# Altium PCB ESP32-PCB.PcbDoc (part 3 of 3)
Units mil, origin at the board's own origin, x right, y up, seen from the top; angles counter-clockwise.
Board outline 2800 x 1000 mil, 4 copper layers (L1, L2, L3, L4), stack 61.094 mil thick; 64 components, 76 nets, 301 pads, 135 vias.
Unrouted connection lines stored in the file: 2.
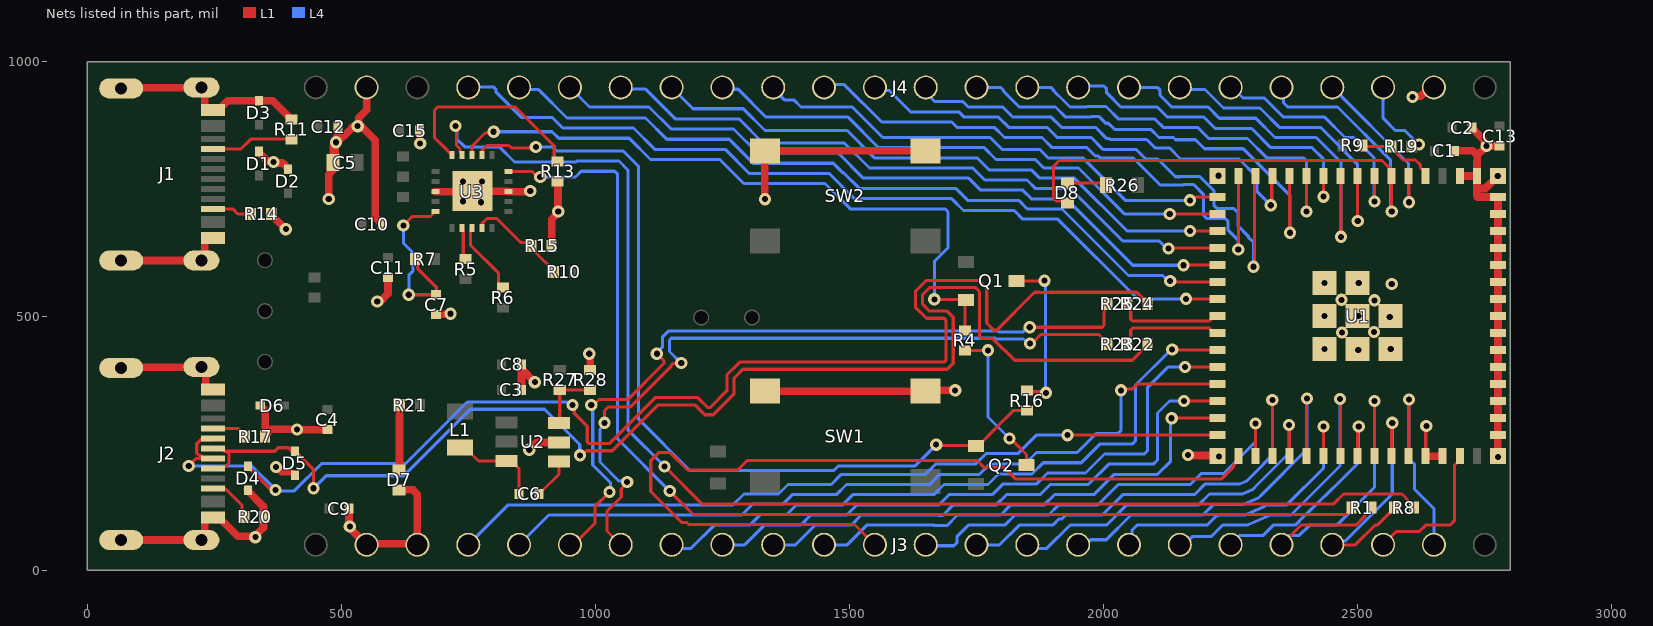
[diagram p4: the nets of this part, all layers, seen from the top]

## Via types
v1: diameter 24, hole 12, L1 to L4, tented both sides, 135 vias

## Nets (pads, with @x,y where several pads share a name; then routed paths per layer and width w, separated by ;. In a path a pad name is that pad's centre, name@x,y a point inside that pad or via, vN(x,y) a via of type N, cw(c..) or ccw(c..) an arc to the next point about the centre after c; other vN are vias at no path point) (continued)
CON2_USB_N: D4.2 J2.A7 J2.B7 R24.2 | length 2711.2
  L1 w6.23: v1(200,205) 215.08,220.08 J2.A7@229.72,220.08 ; J2.A7@247.44,220.08 J2.A7@229.72,220.08 ; J2.B7@247.44,259.45 244.65,256.66 223.33,256.66 215.7,249.03 215.7,230.5 220.46,225.74 224.06,225.74 J2.A7@229.72,220.08 ; D4.2@317,204.24 317,202.67 358.27,161.4 367.6,161.4 v1(371,158) ; v1(955,325.16) 958.4,321.76 958.4,308.93 984,283.33 984,252.83 987.65,249.18 1027.18,249.18 1117.57,339.57 1201.57,339.57 1220.99,320.15 1226.15,320.15 1258.94,352.94 1258.94,384.06 1284.39,409.51 1686.19,409.51 1689.84,413.16 1689.84,492.01 1686.19,495.65 1651.53,495.65 1629.66,517.53 1629.66,548.47 1651.53,570.35 1754.06,570.35 1770.09,554.31 1770.09,486.4 1784.27,472.22 1789.44,472.22 1864.14,546.93 1873.79,546.93 1874.13,546.59 1893.28,546.59 1893.62,546.93 2065.04,546.93 2086,525.97 R24.2@2086,524
  L4 w6.23: v1(200,205) 324,205 v1(371,158) ; v1@372,156 407.88,156 461.88,210 627.29,210 748.29,331 944.35,331 950.19,325.16 v1(955,325.16)
CON2_USB_P: D5.2 J2.A6 J2.B6 R22.2 | length 2556.3
  L1 w6.23: J2.B6@247.44,200.39 250.23,203.18 271.55,203.18 279.18,210.81 279.18,229.35 274.42,234.1 ; J2.A6@247.44,239.76 265.16,239.76 270.82,234.1 274.42,234.1 ; D5.2@406.5,230.17 399,237.67 399,239.24 397.24,241 376.21,241 369.31,234.1 274.42,234.1 ; D5.2@409,234.24 409,232.67 413.76,227.91 415.33,227.91 445.78,197.46 v1(445.78,161.22) ; v1(970,226.07) 973.65,226.07 982.53,234.95 1033.08,234.95 1123.46,325.34 1195.68,325.34 1215.09,305.92 1232.04,305.92 1273.17,347.04 1273.17,378.17 1290.28,395.28 1692.09,395.28 1704.07,407.27 1704.07,497.9 1692.09,509.89 1657.43,509.89 1643.89,523.43 1643.89,542.57 1657.43,556.11 1748.16,556.11 1755.86,548.41 1755.86,459.59 1759.71,455.74 1782.2,455.74 1824.95,413 2056.34,413 2086.37,443.03 R22.2@2086.37,445
  L4 w6.23: v1(445.78,161.22) 470.57,186 623.42,186 754.19,316.77 899.97,316.77 969.33,247.41 969.33,226.74 v1(970,226.07)
CON_ESP_USB_N: J3.19 R25.2 | length 1491.8
  L1 w6.03: J3.19@950,50 957,50 999,92 999,124.62 v1(1028,153.62) ; v1(992,325.16) 996.86,325.16 1007.23,335.52 1063.66,335.52 1135.07,406.93 1135.07,411.93 v1(1121,426) ; v1(1854.74,478) 1997.27,478 2000.8,481.53 2000.8,517.17 R25.2@2007.63,524
  L4 w6.03: v1(992,325.16) 994.98,322.17 994.98,207.11 1029.6,172.49 1029.6,155.23 v1(1028,153.62) ; v1(1121,426) 1121,427.71 1131.81,438.52 1131.81,458.65 1143.61,470.45 1792.36,470.45 1793.9,468.9 1842.22,468.9 1851.31,478 v1(1854.74,478)
CON_ESP_USB_P: J3.18 R23.2 | length 1455.6
  L1 w6.03: v1(1018,290) 1018,313.66 1025.84,321.49 1069.47,321.49 1149.1,401.12 1149.1,403.13 1152.63,406.66 1167.66,406.66 v1(1169,408) ; J3.18@1050,50 1023,77 1023,116.07 1051.02,144.09 1051.02,159.86 1062.63,171.47 v1(1062.63,173.49) ; v1(1855,446) 1858.53,446 1876.5,463.97 1990.63,463.97 2007.63,446.97 R23.2@2007.63,445
  L4 w6.03: v1(1018,290) 1018,286.47 1009.02,277.48 1009.02,212.93 1046.69,175.25 1060.86,175.25 v1(1062.63,173.49) ; v1(1169,408) 1168.36,408 1145.84,430.52 1145.84,452.84 1149.42,456.42 1786.55,456.42 1788.09,454.87 1842.48,454.87 1851.36,446 v1(1855,446)
CON_GPIO0: J4.3 R19.1 | length 175.6
  L1 w6: J4.3@2550,950 J4.3@2554.81,945.19 ; R19.1@2605.37,834 2607.17,835.8 2618.51,835.8 v1(2620.32,837.61)
  L4 w6: J4.3@2550,950 2550,889.37 2574.54,864.83 2593.09,864.83 v1(2620.32,837.61)
DTR_FTDI: Q1.3 R4.1 U3.18 | length 1331.7
  L1 w6: U3.18@757.09,819.74 757.09,832.84 757.25,833 757.25,834.37 782.95,860.06 797.32,860.06 v1(800,862.74) ; v1(1667,533) 1667.5,532.5 1725.5,532.5 1727,531 R4.1@1727,472
  L4 w6: v1(800,862.74) 914.92,862.74 927.75,849.91 1066.72,849.91 1108.62,808 1245,808 1292.28,760.72 1451.72,760.72 1501.38,711.05 1688.14,711.05 1694,705.19 1694,634.49 1667,607.49 v1(1667,533)
ESP_USB_N: R24.1 R25.1 U1.23 | length 206.9
  L1 w6.03: R25.1@2049.25,521.75 2053.46,517.54 2053.46,493.81 2056.99,490.28 2208.14,490.28 2211.68,493.81 2211.68,495.14 2216.54,500 U1.23@2224.41,500
ESP_USB_P: R22.1 R23.1 U1.24 | length 207.6
  L1 w6.03: R22.1@2047,445 2053.46,451.46 2053.46,472.72 2056.99,476.25 2208.14,476.25 2211.68,472.72 2211.68,471.39 2216.54,466.54 U1.24@2224.41,466.54
FTDI_USB_N: R6.2 U3.8 | length 145.9
  L1 w6.03: U3.8@757.02,673.17 755.11,671.26 755.11,665.7 754.19,664.77 754.19,656 754.19,640.04 809.2,585.03 809.2,562.83 816.03,556 R6.2@818,556
FTDI_USB_P: R5.2 U3.9 | length 80.6
  L1 w6.03: U3.9@737.33,673.17 739.24,671.26 739.24,665.7 740.16,664.77 740.16,656 740.16,618.83 740.24,618.75 753.72,618.75 751.75,618.75 R5.2@745,612
GND: C1.1 C2.1 C3.2 C4.1 C5.1 C7.1 C8.1 C9.1 C10.1 C11.1 C12.1 C13.1 C15.1 D1.1 D2.1 D3.1 D4.1 D5.1 D6.1 D7.2 J1.A1B12 J1.B1A12 J1.S1 J1.S2 J1.S3 J1.S4 J2.A1B12 J2.B1A12 J2.S1 J2.S2 J2.S3 J2.S4 J3.22 J3.23 J4.2 J4.23 R11.2 R13.2 R14.2 R15.1 R17.2 R20.2 R28.1 SW1.3 SW2.3 U1.1 U2.2 U3.3 U3.13 U3.21 | length 4963.8
  L1 w6: U1.1@2633.86,224.41 2633.86,282.86 v1(2635,284) ; U1.1@2700.79,775.59 U1.1@2700.79,783.46
  L1 w15: J2.S4@67.13,59.45 J2.S2@225,59.45 231.32,65.77 231.32,99.63 235.63,103.94 J2.B1A12@247.44,103.94 251.75,99.63 263.56,99.63 296.5,66.69 329.31,66.69 v1(331,65) 331,67.44 347.03,83.46 347.03,125.4 317,155.43 D4.1@317,157 317,158.57 316.63,158.95 D4.1@315.05,158.95 ; J2.S3@67.13,398.03 68.11,399.02 224.02,399.02 J2.S1@225,400 233.31,391.69 233.31,360.22 237.62,355.91 J2.A1B12@247.44,355.91 ; J1.S4@67.13,609.45 J1.S2@225,609.45 231.32,615.77 231.32,649.63 235.63,653.94 J1.B1A12@247.44,653.94 ; J1.S3@67.13,948.03 68.11,949.02 224.02,949.02 J1.S1@225,950 231.32,943.68 231.32,910.22 235.63,905.91 259.25,905.91 277.13,923.78 D3.1@338.11,923.78 365.22,923.78 397.69,891.31 397.69,889.34 400.03,887 R11.2@402,887 ; D1.1@338.11,823.78 338.11,822.2 355.59,804.72 365.28,804.72 v1(367,803) 368.72,801.28 384.54,801.28 395,790.82 D2.1@395,789.24 ; D6.1@340.76,324 342.33,324 342.7,323.63 342.7,322.05 350.37,314.39 R17.2@350.37,264.97 ; R17.2@350.37,261.03 R17.2@350.37,263 R17.2@350.37,264.97 ; R14.2@362.37,701 362.37,699.03 384,677.4 384,678 v1(391,671) ; v1(372,203) 374.44,203 383.49,193.95 398.63,193.95 ; 401.2,277 362.4,277 R17.2@350.37,264.97 ; v1(413.2,276.63) C4.1@466.63,276.63 ; v1(475.5,730.2) 475.5,778.86 484.5,787.86 484.5,834.09 522.35,871.94 530.03,871.94 532.46,869.5 534.9,871.94 541.24,871.94 566.99,846.19 566.99,695 580,681.98 C10.1@580,681 ; C5.1@483.76,802 488.3,806.55 488.3,840.26 v1(490.02,841.98) ; v1@490,839 v1(490.02,841.98) ; C12.1@494,873 492.64,871.64 492.64,847.03 490,844.39 v1(490.02,841.98) ; C9.1@514,121 C9.1@515.37,121 515.37,84.63 J3.23@550,50 552.44,52.44 647.56,52.44 J3.22@650,50 ; v1(532.46,873.66) 534.19,875.38 534.19,890.19 550,906 J4.23@550,950 ; v1(571,529) 572.72,530.72 578.45,530.72 592,544.27 C11.1@592,575.63 ; D7.2@614,158 641.21,158 650,149.21 J3.22@650,52.44 ; C15.1@654.37,865 654.87,864.5 654.87,840.34 v1(655.37,839.84) ; U3.13@685.17,745.02 U3.21@757.02,745.02 ; C7.1@686.92,502.71 687.9,503.7 714.34,503.7 v1(715.32,504.68) ; U3.21@758,746 828.49,746 828.87,745.63 U3.3@828.87,745.02 v1@872.98,745.02 ; C3.2@854.37,355 854.69,355.31 C8.1@854.69,396 ; C8.1@855,405 855,396 v1(881,370) ; v1(870,237) 884.42,251.42 U2.2@928.35,251.42 ; v1(872,746) v1@872.98,745.02 ; v1@876.19,744.24 875.42,745.02 v1@872.98,745.02 ; R15.1@914,638 914,690.56 927,703.56 v1(927,706) 926.5,706.5 926.5,764.5 R13.2@926,765 ; v1(988,426) 990,424 R28.1@990,394.37 R28.1@988.03,394.37 ; SW1.3@1333.46,352.17 SW1.3@1650,352.17 1651.83,354 v1(1708,354) ; v1@1333.46,735.46 SW2.3@1333.46,825 SW2.3@1650,825 ; v1(2166,227) 2167.3,225.7 2225.3,225.7 v1(2227,224) ; U1.1@2224.01,775.19 2225.04,776.22 v1(2226.22,776.22) ; v1(2608,931) 2609.72,932.72 2624,932.72 2641.27,950 J4.2@2650,950 ; U1.1@2633.86,224.41 U1.1@2667.32,224.41 ; C1.1@2690.37,825 2726.18,825 2735.09,816.09 ; U1.1@2700.79,775.59 U1.1@2734.25,775.59 ; C2.1@2725,871 2725,870.02 2741.76,853.26 2741.95,853.26 2749.13,846.08 2749.13,841.57 2753.63,837.07 v1(2753.63,834.63) ; 2734.25,737.69 U1.1@2734.25,775.59 ; 2735.06,751.06 2751.06,751.06 v1(2775.59,775.59) ; 2735.69,734.25 U1.1@2775.59,734.25 U1.1@2775.96,733.88 ; U1.1@2767.34,216.16 U1.1@2775.59,224.41 U1.1@2775.59,299.21 ; v1(2776,223) U1.1@2776,224 ; U1.1@2776,299.21 U1.1@2776,733.88 ; C13.1@2779,834.63 v1(2753.63,834.63) ; U1.1@2734.25,775.59 2734.63,775.96 2734.63,803.44 2735.09,803.91 2735.09,816.09 ; 2735.09,816.09 v1(2753.63,834.63)
  L4 w15: J4.2@2650,950 J4.2@2651.11,948.89
  other v1: 517,86 2501,433 2435.04,435.04 2564.96,435.04 2469,468 2532,469 2563,498 2435.04,500 2501,500 2533,531 2468,532 2567,563 2435.04,564.96 2502,565 775,724 740,726 1334,730 740,765 777,765
GPIO0: R9.2 R19.2 U1.4 | length 158.5
  L1 w6: R9.2@2509.37,834 R19.2@2566,834 2566,832.03 2572.81,825.22 2572.81,823.69 2589.31,807.19 2613.63,807.19 2623.27,797.55 2623.27,792.2 2629.13,786.34 2630.98,786.34 2633.86,783.46 U1.4@2633.86,775.59
GPIO1: J4.4 U1.5 | length 340.4
  L1 w6: U1.5@2600.39,775.59 2600.39,724.61 v1(2601,724)
  L4 w6: J4.4@2450,950 2599.91,800.09 2599.91,725.09 v1(2601,724)
GPIO2: D8.2 J4.5 U1.6 | length 1246.7
  L1 w6: D8.2@1930.66,720.97 1925.4,726.23 1907.77,726.23 1901.2,732.8 1901.2,794.14 1913.06,806 2202.11,806 2202.45,806.34 2547.55,806.34 2547.89,806 2564.06,789.84 2564.06,778.46 U1.6@2566.93,775.59 v1(2566.93,706)
  L4 w6: J4.5@2350,950 2354.14,945.86 2354.14,919.52 2362.29,911.38 2460.34,911.38 2564.25,807.47 2564.25,708.68 v1(2566.93,706)
GPIO3: J4.6 U1.7 | length 476.4
  L1 w6: v1(2533.23,725.3) 2533.35,725.42 2533.35,775.47 U1.7@2533.46,775.59
  L4 w6: J4.6@2250,950 2253.74,950 2274.48,929.26 2316.12,929.26 2354,891.38 2434.91,891.38 2474.91,851.38 2492.05,851.38 2531.87,811.56 2531.87,726.66 v1(2533.23,725.3)
GPIO4: J4.7 U1.8 | length 612.6
  L1 w6: v1(2500,687) U1.8@2500,775.59
  L4 w6: J4.7@2150,950 2154.14,945.86 2199.52,945.86 2236.12,909.26 2307.83,909.26 2345.72,871.38 2426.62,871.38 2500,798 v1(2500,687)
GPIO5: J4.8 U1.9 | length 750.4
  L1 w6: U1.9@2466.54,775.59 2466.77,775.36 2466.77,656.23 v1(2467,656)
  L4 w6: J4.8@2050,950 2105.52,950 2111.38,944.14 2111.38,934 2134,911.38 2205.72,911.38 2227.83,889.26 2247.74,889.26 2299.55,889.26 2337.43,851.38 2418.34,851.38 2467,802.72 v1(2467,656)
GPIO6: J4.9 U1.10 | length 662.4
  L1 w6: v1(2433,735) 2433.07,735.07 U1.10@2433.07,775.59
  L4 w6: J4.9@1950,950 1952.63,952.63 2000.51,952.63 2006,947.14 2006,939.38 2034,911.38 2105.72,911.38 2125.72,891.38 2197.43,891.38 2219.55,869.26 2238.74,869.26 2291.26,869.26 2329.15,831.38 2410.05,831.38 2433,808.43 v1(2433,735)
GPIO7: J4.10 U1.11 | length 779.7
  L1 w6: v1(2399,706) 2399,707 2399.61,707.61 U1.11@2399.61,775.59
  L4 w6: J4.10@1850,950 1896.14,950 1902,944.14 1902,943 1912,933 1912.38,933 1934,911.38 1966,911.38 1966.98,912.36 2004.74,912.36 2005.72,911.38 2029.6,887.5 2101.31,887.5 2117.43,871.38 2184.62,871.38 2206.74,849.26 2230.45,849.26 2282.98,849.26 2320.87,811.38 2393.14,811.38 2399,805.52 v1(2399,706)
GPIO8: J4.11 U1.12 | length 892
  L1 w6: U1.12@2366.14,775.59 2366.14,666.86 2367,666 v1(2367,664)
  L4 w6: J4.11@1750,950 1797.14,950 1803,944.14 1803,942.38 1834,911.38 1905.34,911.38 1925.34,891.38 1974.28,891.38 1975.26,892.36 1991.36,892.36 2004.28,879.44 2009.37,879.44 2021.31,867.5 2093.03,867.5 2109.15,851.38 2137.43,851.38 2141.81,847 2180.72,847 2198.45,829.26 2274.7,829.26 2367,736.96 v1(2367,664)
GPIO9: J4.12 U1.13 | length 856.7
  L1 w6: v1(2329,718) 2330.84,719.84 2330.84,773.75 U1.13@2332.68,775.59
  L4 w6: J4.12@1650,950 1650,940.34 1668.34,922 1723.38,922 1734,911.38 1801.62,911.38 1821.62,891.38 1897.05,891.38 1917.05,871.38 1984.05,871.38 2006.43,849 2011.53,849 2013.03,847.5 2084.74,847.5 2101.24,831 2129.53,831 2151.26,809.26 2266.41,809.26 2301.44,774.24 2301.44,745.56 v1(2329,718)
GPIO10: J4.13 U1.14 | length 1133.7
  L1 w6: v1(2295,597) 2297.11,599.11 2297.11,773.48 U1.14@2299.21,775.59
  L4 w6: J4.13@1550,950 1556.31,943.69 1578.31,943.69 1620,902 1715.1,902 1725.72,891.38 1793.34,891.38 1813.34,871.38 1888.77,871.38 1908.77,851.38 1975.77,851.38 1999.65,827.5 2064.65,827.5 2082.88,809.26 2106.45,809.26 2141.59,774.13 2149.87,774.13 2150.53,774.79 2189.47,774.79 2217,747.26 2217,717.86 2222.86,712 2255.71,712 2265,702.71 2265,677.28 2284.91,657.38 2284.91,655.09 2295,645 v1(2295,597)
GPIO11: J4.14 U1.15 | length 1141.7
  L1 w6: v1(2265,631) 2265.37,631.37 2265.37,775.22 U1.15@2265.75,775.59
  L4 w6: J4.14@1450,950 1455.38,955.38 1490,955.38 1563.38,882 1701,882 1711.62,871.38 1785.05,871.38 1805.05,851.38 1879,851.38 1899,831.38 1967.49,831.38 1983.86,815 1989.52,815 1993.02,811.5 2058.02,811.5 2111.39,758.13 2156.5,758.13 2157.16,758.79 2177.18,758.79 2197,738.97 2197,697.86 2202.86,692 2239.14,692 2245,686.14 2245,669 2264.91,649.09 2264.91,631.09 v1(2265,631)
GPIO12: J4.15 U1.16 | length 970.7
  L1 w6: v1(2170,727.79) 2173.79,727.79 2180.25,734.25 U1.16@2224.41,734.25
  L4 w6: J4.15@1350,950 1350,947.38 1371.86,925.52 1390.48,925.52 1404.62,911.38 1505.62,911.38 1565.62,851.38 1776.77,851.38 1800.1,828.05 1874.05,828.05 1890.72,811.38 1959,811.38 2042.59,727.79 v1(2170,727.79)
GPIO13: J4.16 U1.17 | length 1077.9
  L1 w6: v1@2130,701 v1(2130.21,700.79) U1.17@2224.41,700.79
  L4 w6: J4.16@1250,950 1253.67,946.33 1280.95,946.33 1335.91,891.38 1497.34,891.38 1557.34,831.38 1765,831.38 1788.33,808.05 1865.76,808.05 1882.43,791.38 1950.72,791.38 2040.87,701.22 2129.78,701.22 v1(2130.21,700.79)
GPIO14: J4.17 U1.18 | length 1192
  L1 w6: v1@2170,667 v1(2170.32,667.32) U1.18@2224.41,667.32
  L4 w6: J4.17@1150,950 1192,908 1291,908 1334,865 1495.43,865 1549.05,811.38 1751,811.38 1774.62,787.76 1857.76,787.76 1874.15,771.38 1942.43,771.38 2046.49,667.32 v1(2170.32,667.32)
GPIO15: J4.18 U1.19 | length 1306.5
  L1 w6: v1(2128,633) 2128.86,633.86 U1.19@2224.41,633.86
  L4 w6: J4.18@1050,950 1052.86,947.14 1099,947.14 1099,946.38 1157.38,888 1282.72,888 1330,840.72 1490,840.72 1539.34,791.38 1742.72,791.38 1766.33,767.76 1849.48,767.76 1866.48,750.76 1934.76,750.76 2038.2,647.32 2109.89,647.32 2124.21,633 v1(2128,633)
GPIO16: J4.19 U1.20 | length 1419.5
  L1 w6: v1(2157,600) 2157.2,600.2 2224.21,600.2 U1.20@2224.41,600.39
  L4 w6: J4.19@950,950 988.62,911.38 1105.72,911.38 1149.1,868 1272,868 1319.28,820.72 1478,820.72 1527.34,771.38 1734.43,771.38 1758.05,747.76 1841.19,747.76 1858.19,730.76 1926.48,730.76 1950.24,707 2057.24,600 v1(2157,600)
GPIO17: J4.20 U1.21 | length 1533.1
  L1 w6: v1(2131,569) 2133.07,566.93 U1.21@2224.41,566.93
  L4 w6: J4.20@850,950 854.39,945.61 888.62,945.61 944.32,889.91 1098.91,889.91 1140.81,848 1263.72,848 1311,800.72 1468.28,800.72 1487,782 1488.43,782 1519.05,751.38 1709,751.38 1732.62,727.76 1832.91,727.76 1849.91,710.76 1918.19,710.76 2048.96,580 2116.21,580 2127.21,569 v1(2131,569)
GPIO18: J4.21 U1.22 | length 1650.6
  L1 w6: v1(2162,534) 2162.27,533.73 2224.14,533.73 U1.22@2224.41,533.46
  L4 w6: J4.21@750,950 751,951 799.14,951 805,945.14 805,940.38 854.38,891 914.94,891 936.04,869.91 1075,869.91 1116.91,828 1255.43,828 1302.72,780.72 1460,780.72 1509.67,731.05 1701.05,731.05 1724.33,707.76 1824,707.76 1841,690.76 1909.91,690.76 2066.67,534 v1(2162,534)
GPIO21: J3.17 U1.25 | length 1304.1
  L1 w6: v1(2135,434) 2135.46,433.54 2223.94,433.54 U1.25@2224.41,433.07
  L4 w6: J3.17@1150,50 1157,43 1188.38,43 1234,88.62 1304.06,88.62 1325.44,110 1377,110 1395.62,128.62 1486.67,128.62 1506.67,148.62 1666,148.62 1686,168.62 1772.43,168.62 1793.24,189.43 1859.29,189.43 1881.32,211.45 1956.26,211.45 1993.43,248.62 2057.14,248.62 2063,254.48 2063,364.47 2132.53,434 v1(2135,434)
GPIO26: J3.16 U1.26 | length 1192.9
  L1 w6: v1@2160,400 v1(2160.39,399.61) U1.26@2224.41,399.61
  L4 w6: J3.16@1250,50 1293.73,50 1332.35,88.62 1404.06,88.62 1424.06,108.62 1494.96,108.62 1514.96,128.62 1676.05,128.62 1696.05,148.62 1780.72,148.62 1801.52,169.43 1867.57,169.43 1889.6,191.45 1964.55,191.45 2001.72,228.62 2080.19,228.62 2086.05,234.48 2086.05,359.23 2126.42,399.61 v1(2160.39,399.61)
GPIO33: J3.15 U1.28 | length 1046.6
  L1 w6: v1(2158,333) 2158.32,332.68 U1.28@2224.41,332.68
  L4 w6: J3.15@1350,50 1393.73,50 1432.35,88.62 1503.24,88.62 1523.24,108.62 1674.28,108.62 1675.17,107.74 1683.45,107.74 1704.34,128.62 1789,128.62 1809,148.62 1875.05,148.62 1895.05,168.62 1970,168.62 2010,208.62 2097.72,208.62 2106.05,216.95 2106.05,309.23 2129.82,333 v1(2158,333)
GPIO34: J3.14 U1.29 | length 926.6
  L1 w6: v1(2134,299) 2134.11,299.11 2224.3,299.11 U1.29@2224.41,299.21
  L4 w6: J3.14@1450,50 1495.38,50 1534,88.62 1666,88.62 1666.88,87.74 1691.74,87.74 1712.62,108.62 1797.43,108.62 1817.43,128.62 1883.34,128.62 1903.34,148.62 1980.87,148.62 2020.87,188.62 2106,188.62 2132,214.62 2132,297 v1(2134,299)
GPIO35: J3.13 U1.31 | length 1770.5
  L1 w6: J3.13@1550,50 1510,90 1183.84,90 1179.84,94 1169.94,94 1109,154.94 1109,215.49 1124.82,231.31 1147.18,231.31 1181.49,197 1280.12,197 1299.12,216 1750.97,216 1764.52,202.45 1803.79,202.45 1826.45,179.79 2232.5,179.79 2255.16,202.45 2255.16,205.94 2262.87,213.66 2262.87,221.54 U1.31@2265.75,224.41
GPIO36: J3.12 U1.32 | length 842.3
  L1 w6: v1@2299,289 v1(2299.11,288.89) 2299.21,288.79 U1.32@2299.21,224.41
  L4 w6: J3.12@1650,50 1651.86,48.14 1705.52,48.14 1711.38,54 1711.38,66 1734,88.62 1805.72,88.62 1825.72,108.62 1891.62,108.62 1911.62,128.62 1989.15,128.62 2029.15,168.62 2170.49,168.62 2191.86,190 2236,190 2299.11,253.11 v1(2299.11,288.89)
GPIO37: J3.11 U1.33 | length 873.6
  L1 w6: v1(2332,335) 2332.68,334.32 U1.33@2332.68,224.41
  L4 w6: J3.11@1750,50 1795.38,50 1834,88.62 1899.91,88.62 1912.28,101 1918.1,101 1925.72,108.62 1997.43,108.62 2037.43,148.62 2178.77,148.62 2200.15,170 2257.72,170 2268.79,170 2281.73,175.73 2294.81,188.81 2332,226 v1(2332,335)
GPIO38: J3.10 U1.34 | length 711.2
  L1 w6: v1(2365,286) 2366.14,284.86 U1.34@2366.14,224.41
  L4 w6: J3.10@1850,50 1857,43 1888.38,43 1934,88.62 2005.72,88.62 2045.72,128.62 2187.05,128.62 2208.43,150 2266,150 2273.02,150 2293.24,158.95 2303.03,168.74 2365,230.72 v1(2365,286)
GPIO39: J3.9 U1.35 | length 739.3
  L1 w6: U1.35@2399.61,224.41 2399.61,337.61 v1(2400,338)
  L4 w6: J3.9@1950,50 1957.13,57.13 1971.61,57.13 1974.48,60 2005.38,60 2054,108.62 2195.34,108.62 2215.72,129 2275,129 2304.74,142.18 2311.25,148.68 2400,237.43 v1(2400,338)
GPIO40: J3.8 U1.36 | length 596.1
  L1 w6: v1(2433,283) 2433.07,282.93 U1.36@2433.07,224.41
  L4 w6: J3.8@2050,50 2055.81,55.81 2055.81,78.81 2065.62,88.62 2203.62,88.62 2222,107 2224.1,107 2225.72,108.62 2278.38,108.62 2316.25,125.4 2319.47,128.62 2360.34,128.62 2433,201.28 v1(2433,283)
GPIO41: J3.7 U1.37 | length 620.4
  L1 w6: v1(2465,337) 2465,336 2466.54,334.46 U1.37@2466.54,224.41
  L4 w6: J3.7@2150,50 2158.48,50 2174.48,66 2211.38,66 2234,88.62 2280.49,88.62 2282.61,88.62 2284.54,89.48 2327.76,108.62 2368.62,108.62 2465,205 v1(2465,337)
GPIO42: J3.6 U1.38 | length 449
  L1 w6: U1.38@2500,224.41 2500,281 v1(2502,283)
  L4 w6: J3.6@2250,50 2268.62,68.62 2314,68.62 2334,88.62 2347.57,88.62 2376.91,88.62 2395.48,107.19 2398.71,110.03 2470.21,180.21 2502,212 v1(2502,283)
GPIO45: J3.2 U1.41 | length 418.1
  L1 w6: U1.41@2600.39,224.41 2600.39,335.39 v1(2601,336)
  L4 w6: v1(2601,336) 2601,219 2612,208 2612,159 2650,121 J3.2@2650,50
GPIO46: J3.3 U1.44 | length 291.3
  L1 w6: J3.3@2550,50 2576,76 2621.38,76 2634,88.62 2681.62,88.62 2690.2,97.2 2690.2,205.94 2700.79,216.54 U1.44@2700.79,224.41
GPIO47: J3.20 U1.27 | length 1551.9
  L1 w6: v1(2034,354) 2036.68,356.68 2056.54,356.68 2066,366.14 U1.27@2224.41,366.14
  L4 w6: J3.20@850,50 908.62,108.62 1288,108.62 1309.38,130 1368.72,130 1387.34,148.62 1474,148.62 1494,168.62 1657.72,168.62 1677.72,188.62 1756,188.62 1776.8,209.43 1846,209.43 1868.03,231.45 1947.98,231.45 1985.15,268.62 2028.14,268.62 2034,274.48 v1(2034,354)
GPIO48: J3.21 U1.30 | length 1563.8
  L1 w6: v1(1929.08,265.75) U1.30@2224.41,265.75
  L4 w6: J3.21@750,50 828.62,128.62 1271,128.62 1292.38,150 1360.43,150 1379.05,168.62 1464,168.62 1484,188.62 1649.43,188.62 1669.43,208.62 1747.72,208.62 1768.52,229.43 1831.43,229.43 1867.75,265.75 v1(1929.08,265.75)
NetC6_1: C6.1 L1.1 U2.6 | length 182.9
  L1 w6: L1.1@734.09,241.14 743.94,241.14 770.08,215 U2.6@825,215 834.84,215 850,199.84 C6.1@850,150
NetC6_2: C6.2 U2.1 | length 80.7
  L1 w6: C6.2@889.37,150 889.37,150.98 893.23,154.84 894.21,154.84 928.35,188.98 U2.1@928.35,214.02
NetC7_2: C7.2 R7.2 U3.11 | length 356.6
  L1 w6: v1(622.23,678.43) 639.8,696 675.52,696 682.29,702.77 682.29,705.57 682.37,705.65 U3.11@685.17,705.65 ; v1(633,542) v1(633,542) 686.88,542.04 C7.2@686.92,542.08 ; R7.2@645,612 649.84,607.16 649.84,594.39 687.26,556.97 C7.2@687.26,550.16
  L4 w6: v1(622.23,678.43) 622.23,643.77 640.92,625.08 640.92,588.44 633,580.52 v1(633,542)
NetD7_1: D7.1 R21.2 | length 128.3
  L1 w15: D7.1@614,197.37 614.81,198.19 614.81,324.19 R21.2@615.63,325
NetD8_1: D8.1 R26.1 | length 77.9
  L1 w6: D8.1@1929,762 R26.1@2000.7,762
  L1 w15: R26.1@2000.7,762 2005.01,757.69 R26.1@2005.01,757.61
NetJ1_A5: J1.A5 R11.1 | length 161.9
  L1 w6: J1.A5@247.44,829.13 302.69,829.13 321.78,848.23 R11.1@401.4,848.23
NetJ1_B5: J1.B5 R14.1 | length 79.7
  L1 w6: J1.B5@247.44,711.02 286.65,711.02 296.67,701 R14.1@323,701
NetJ2_A5: J2.A5 R17.1 | length 71.4
  L1 w6: J2.A5@247.44,279.13 296.83,279.13 311,264.97 R17.1@311,263
NetJ2_B5: J2.B5 R20.1 | length 96
  L1 w6: J2.B5@247.44,161.02 248.35,160.12 272.33,160.12 305.16,127.29 305.16,109.84 R20.1@310,105
NetQ1_1: Q1.1 R16.2 | length 317.7
  L1 w6: Q1.1@1828.41,569.4 1883.4,569.4 v1(1883.7,569.7) v1@1884,570 ; R16.2@1849,353.37 1851.18,351.19 1884.81,351.19 v1(1887,349)
  L4 w6: v1(1883.7,569.7) 1885.35,568.05 1885.35,350.65 v1(1887,349)
NetQ2_1: Q2.1 R4.2 | length 295.7
  L1 w6: R4.2@1727,432.63 v1(1772.63,432.63) v1@1773,433 ; v1@1822,254 1848.41,227.59 Q2.1@1848.41,206.6
  L4 w6: v1(1772.63,432.63) 1772.63,301.37 v1(1815,259)
NetR13_1: R13.1 U3.16 | length 406.3
  L1 w6: U3.16@717.65,816.87 701.51,833 684,850.51 684,905.52 689.86,911.38 842.62,911.38 919.19,834.81 919.19,809.21 924.03,804.37 R13.1@926,804.37
NetR27_1: R27.1 R28.2 U2.3 | length 125.9
  L1 w6: U2.3@928.35,289.8 930,291.46 R27.1@930,355 R28.2@990,355
RTS_FTDI: Q2.2 R16.1 U3.19 | length 1692.3
  L1 w6: U3.19@776.78,819.74 776.78,825.61 786.91,835.74 830.19,835.74 832.93,833 835.19,830.74 856,830.74 880.74,830.74 v1(882.91,832.91) ; v1(1670.68,247) 1672.18,245.5 1747.5,245.5 Q2.2@1749,244 1752.94,244 1790.97,282.03 1790.97,282.78 1822.19,314 R16.1@1849,314
  L4 w6: v1(882.91,832.91) 916.47,832.91 924.38,825 1054.71,825 1085.35,794.37 1085.35,296.84 1186.18,196 1468.75,196 1477.37,204.62 1628.3,204.62 v1(1670.68,247)
RXD_FTDI: R1.2 U3.1 | length 2259.5
  L1 w6: U3.1@828.87,784.39 875.61,784.39 883.58,776.42 888.97,776.42 v1(891.65,773.74) ; v1(1146.5,155.62) 1192.12,110 2476.97,110 2488,121.03 R1.2@2488,123
  L4 w6: v1(891.65,773.74) 961.16,773.74 972.42,785 1038.14,785 1044,779.14 1044,258.12 v1(1146.5,155.62)
TXD_FTDI: R8.2 U3.17 | length 2588.9
  L1 w6: v1(725,874) 726.91,872.09 726.91,835.96 729.86,833 733.57,829.3 733.57,825.68 733.65,825.6 733.65,823.35 U3.17@737.25,819.74 ; v1(1136,204.31) 1210.31,130 2452.13,130 2471.94,149.81 2587.06,149.81 2595.84,141.02 2595.84,139.5 2610.37,124.97 R8.2@2610.37,123
  L4 w6: v1(725,874) 727.68,871.32 727.68,848.19 742.87,833 811,833 841,803 856,803 962.14,803 964.14,805 1046.43,805 1064,787.43 1064,276.31 v1(1136,204.31)
U0RXD: J3.4 R8.1 U1.40 | length 517.8
  L1 w6: J3.4@2450,50 2495.38,50 2534,88.62 2538.59,88.62 2571,121.03 R8.1@2571,123 ; U1.40@2566.93,224.41 2566.93,288.93 v1(2568,290)
  L4 w6: J3.4@2450,50 2457.13,57.13 2475.13,57.13 2568,150 v1(2568,290)
U0TXD: J3.5 R1.1 U1.39 | length 725.6
  L1 w6: J3.5@2350,50 2388.62,88.62 2496.49,88.62 2512.84,104.98 2512.84,106.5 2527.37,121.03 R1.1@2527.37,123 ; v1(2533,333) 2533.46,332.54 U1.39@2533.46,224.41
  L4 w6: J3.5@2350,50 2350,62.76 2355.86,68.62 2385.19,68.62 2405.46,88.62 2458.62,88.62 2533,163 v1(2533,333)
VBUS_SENSE: R10.1 R15.2 U3.7 | length 203.6
  L1 w6: U3.7@776.7,673.17 776.78,673.24 776.78,681.91 786.91,692.04 805.86,692.04 853.09,644.81 869.79,644.81 874.63,639.97 R15.2@874.63,638 879.47,633.16 879.47,628.13 918.63,588.97 R10.1@918.63,587
pads on no net: J1.A8 J1.B8 J2.A8 J2.B8 J4.24 U3.2 U3.4 U3.5 U3.6 U3.14 U3.15

## Polygon pours and split planes (outlines as drawn)
GND on L1 "GND_L01_P001" (solid, pour order 1): 2400,599 2400,407 2407,400 2606,400 2606,568 2575,599
GND on L3 "GND_L03_P010" (solid, pour order 10): -4.62,2.45 12.38,19.45 2788.38,19.45 2788.38,982.45 2793.38,987.45 2771.38,1009.45 -0.62,1009.45 -0.62,20.45 4.38,15.45
GND on L2 (split plane): 2779.9,20.1 20.1,20.1 20.1,979.9 2779.9,979.9

## Silkscreen, mask and mechanical layers (free items; w line width, h text height)
Top Overlay:
  drawing of 9 lines, arcs and shapes, not listed
  text "J4" at 2247,865 h40
  text "USER" at 1876,806 h40
  text "USER/BOOT" at 945,672 h40
  text "USB1" at 424,612 h40
  text "UART" at 132,522 h40
  text "+3V3REG" at 861,484 h40
  text "+3V3" at 1395,483 h40
  text "+5V" at 415,468 h40
  text "ESP" at 182,453 h40
  text "USB2" at 416,376 h40
  text "RESET" at 1094,274 h40
  text "POWER" at 503,236 h40
  text "J3" at 2226,116 h40
Bottom Overlay:
  text "+3V3" at 2777,886 h40 r90
  text "IO1" at 2489,884 h40 r90
  text "IO5" at 2095,883 h40 r90
  text "IO3" at 2287,883 h40 r90
  text "IO2" at 2393,883 h40 r90
  text "IO0" at 2591,883 h40 r90
  text "+5V" at 582,882 h40 r90
  text "IO18" at 787,882 h40 r90
  text "IO6" at 2001,882 h40 r90
  text "IO4" at 2197,882 h40 r90
  text "GND" at 2683,882 h40 r90
  text "IO17" at 906,881 h40 r90
  text "IO13" at 1299,881 h40 r90
  text "IO12" at 1402,881 h40 r90
  text "IO10" at 1590,881 h40 r90
  text "IO8" at 1793,881 h40 r90
  text "IO7" at 1894,881 h40 r90
  text "IO16" at 1002,880 h40 r90
  text "IO15" at 1084,879 h40 r90
  text "IO14" at 1196,879 h40 r90
  text "IO11" at 1486,879 h40 r90
  text "IO9" at 1695,879 h40 r90
  text "GND" at 682,877 h40 r90
  text "NC" at 472,875 h40 r90
  text "+3V3" at 471,279 h40 r90
  text "IO46" at 2572,274 h40 r90
  text "IO45" at 2667,272 h40 r90
  text "IO47" at 871,271 h40 r90
  text "IO42" at 2267,270 h40 r90
  text "IO40" at 2069,269 h40 r90
  text "IO48" at 774,268 h40 r90
  text "IO41" at 2170,268 h40 r90
  text "IO39" at 1968,267 h40 r90
  text "IO33" at 1368,266 h40 r90
  text "USB-" at 969,265 h40 r90
  text "IO21" at 1168,265 h40 r90
  text "IO26" at 1266,265 h40 r90
  text "IO34" at 1470,265 h40 r90
  text "IO35" at 1566,265 h40 r90
  text "IO37" at 1768,264 h40 r90
  text "USB+" at 1070,263 h40 r90
  text "IO36" at 1666,263 h40 r90
  text "IO38" at 1868,263 h40 r90
  text "TXD" at 2367,243 h40 r90
  text "RXD" at 2471,239 h40 r90
  text "GND" at 668,234 h40 r90
  text "GND" at 572,233 h40 r90
  text "EN" at 2770,217 h40 r90
Mechanical1:
  the board outline again, w20